# Altium PCB PCB.PcbDoc
Units mm, origin at the board's own origin, x right, y up, seen from the top; angles counter-clockwise.
Board outline 11.25 x 9.5 mm, 8 copper layers (Top Layer, Int1 (Sign), Int2 (Sign), Int3 (Sign), Int4 (Sign), Int5 (Sign), Int6 (Sign), Bottom Layer), stack 0.741 mm thick; 45 components, 24 nets, 187 pads, 97 vias.
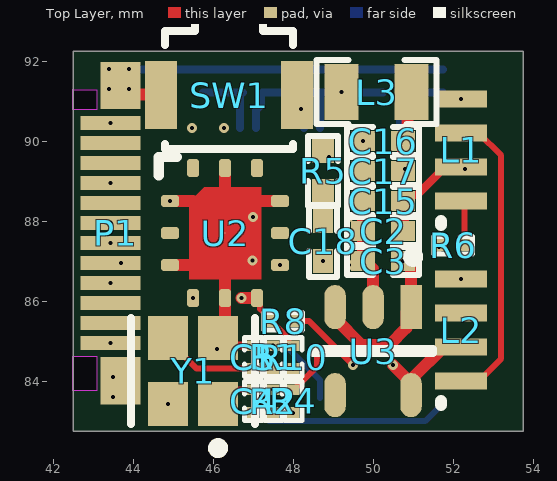
[diagram p0: Top Layer view]
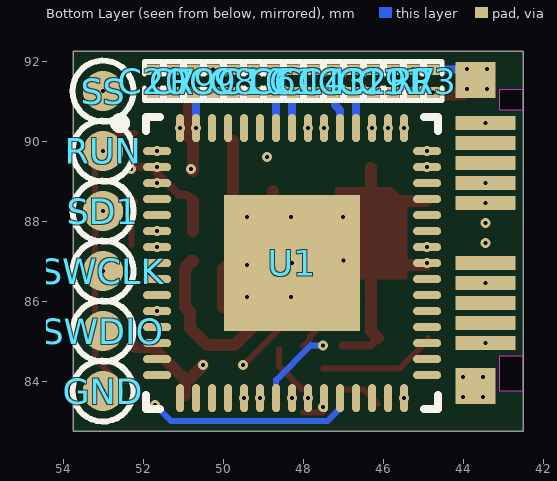
[diagram p1: Bottom Layer view, seen from below]
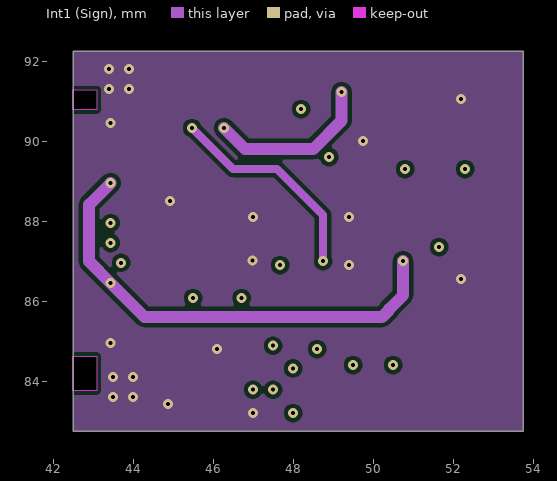
[diagram p2: Int1 (Sign)]
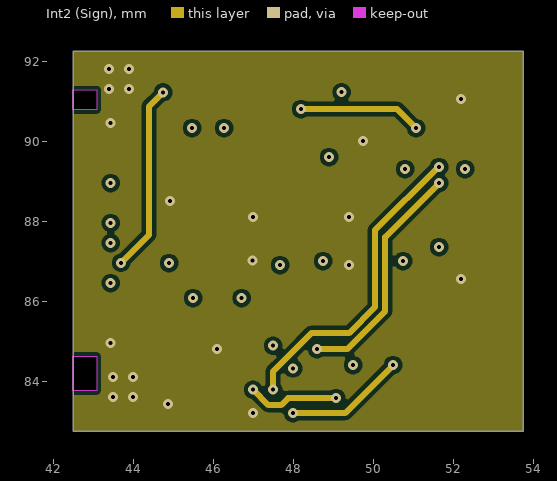
[diagram p3: Int2 (Sign)]
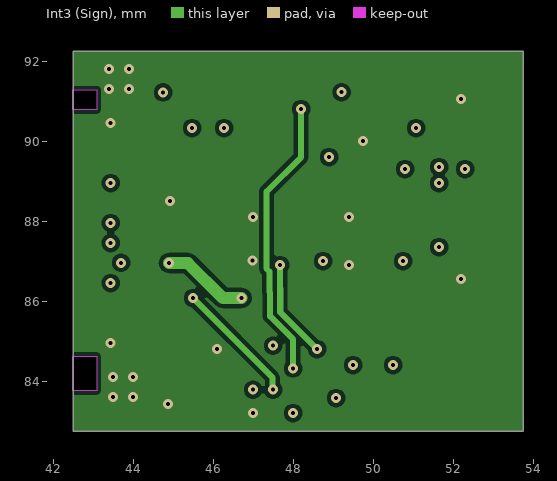
[diagram p4: Int3 (Sign)]
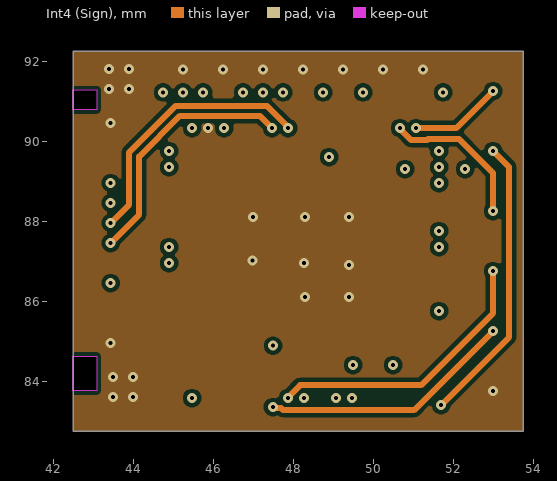
[diagram p5: Int4 (Sign)]
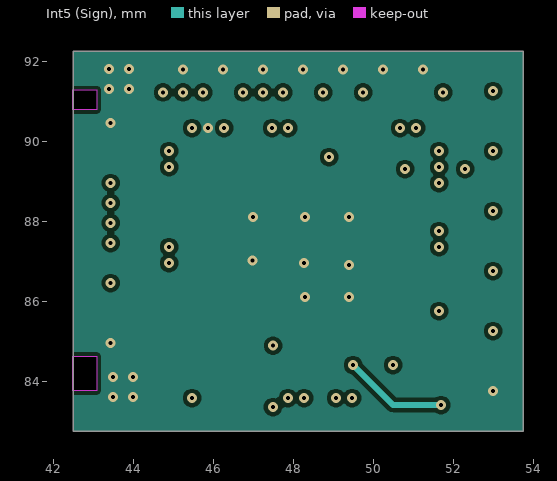
[diagram p6: Int5 (Sign)]
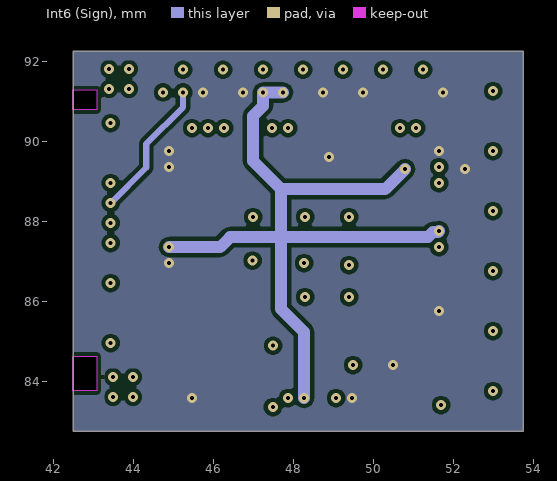
[diagram p7: Int6 (Sign)]
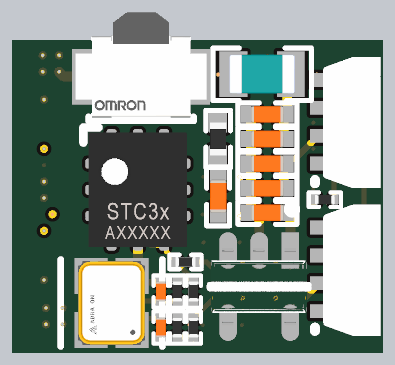
[diagram p8: 3D render of the assembled board from above, using the file's embedded part models]
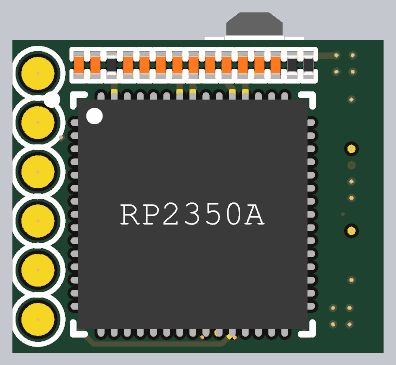
[diagram p9: 3D render of the assembled board from below, using the file's embedded part models]

## Layer stack, top to bottom
Top Solder: solder mask 0.0254, SM-001, Dk 4
Top Layer: signal copper 0.0175
Dielectric 2: prepreg 0.0584, PP-002, Dk 3.8
Int1 (Sign): signal copper 0.0175
Dielectric 3: prepreg 0.0584, PP-002, Dk 3.8
Int2 (Sign): signal copper 0.0175
Dielectric 5: prepreg 0.0584, PP-002, Dk 3.8
Int3 (Sign): signal copper 0.0175
Dielectric 6: core 0.2507, Core-027, Dk 4.5
Int4 (Sign): signal copper 0.0175
Dielectric 7: prepreg 0.0584, PP-002, Dk 3.8
Int5 (Sign): signal copper 0.0175
Dielectric 9: prepreg 0.0584, PP-002, Dk 3.8
Int6 (Sign): signal copper 0.0175
Dielectric 10: prepreg 0.0584, PP-002, Dk 3.8
Bottom Layer: signal copper 0.0175
Bottom Solder: solder mask 0.0254, SM-001, Dk 4

## Board outline
42.5,82.75 53.75,82.75 53.75,92.25 42.5,92.25

## Design rules (kind name [scope] priority, off if disabled: settings)
BoardOutlineClearance [All] p1: gap=0.005 ignorepadtopadclearanceinfootprint=FALSE
Clearance [All] p1: gap=0.1 ignorepadtopadclearanceinfootprint=TRUE
ComponentClearance [All] p1 off: gap=0.254 collisioncheckmode=3 verticalgap=0.254 showdistances=FALSE
DiffPairsRouting [InDifferentialPair('DiffPair')] p1: maxlimit=0.254 minlimit=0.089 mostfreqgap=0.2 toplayer_minwidth=0.089 toplayer_maxwidth=0.381 toplayer_prefwidth=0.15 midlayer1_minwidth=0.089 midlayer1_maxwidth=0.381 midlayer1_prefwidth=0.15 midlayer2_minwidth=0.089 midlayer2_maxwidth=0.381 midlayer2_prefwidth=0.15 midlayer3_minwidth=0.089 midlayer3_maxwidth=0.381 midlayer3_prefwidth=0.15 midlayer4_minwidth=0.089 midlayer4_maxwidth=0.381 midlayer4_prefwidth=0.15 midlayer5_minwidth=0.089 midlayer5_maxwidth=0.381 midlayer5_prefwidth=0.15 midlayer6_minwidth=0.089 midlayer6_maxwidth=0.381 midlayer6_prefwidth=0.15 bottomlayer_minwidth=0.089 bottomlayer_maxwidth=0.381 bottomlayer_prefwidth=0.15 maxuncoupledlength=12.7
HoleSize [All] p1 off: absolutevalues=TRUE maxlimit=2.54 minlimit=0.025 maxpercent=80.000 minpercent=20.000
HoleToHoleClearance [All] p1 off: gap=0.254 allowstackedmicrovias=TRUE
MatchedLengths usb [InDifferentialPair('USB')] p1: tolerance=1 checknetsindiffpair=FALSE checkdiffpairvsdiffpair=TRUE checkxsignals=TRUE checkothers=TRUE
MinimumAnnularRing [IsVia] p1: minimumring=0.076
MinimumSolderMaskSliver [All] p1 off: minsoldermaskwidth=0.254
PlaneConnect [InNet('NetC11_2')] p1: planeconnectstyle=Direct reliefexpansion=0.508 reliefentries=4 reliefconductorwidth=0.254 reliefairgap=0.254
PolygonConnect [All] p1: thpad.connectstyle=Relief thpad.reliefconductorwidth=0.254 thpad.reliefentries=4 thpad.polygonreliefangle="90 Angle" thpad.airgapwidth=0.254 smdpad.connectstyle=Relief smdpad.reliefconductorwidth=0.254 smdpad.reliefentries=4 smdpad.polygonreliefangle="90 Angle" smdpad.airgapwidth=0.254 via.connectstyle=Direct via.reliefconductorwidth=0.254 via.reliefentries=4 via.polygonreliefangle="90 Angle" via.airgapwidth=0.254
PolygonConnect 3V3MCU [InNet('NetC11_2')] p2: connectstyle=Direct reliefconductorwidth=0.254 reliefentries=4 polygonreliefangle="90 Angle" airgapwidth=0.254
PolygonConnect VBUSMCU [InNet('NetC12_2')] p3: connectstyle=Direct reliefconductorwidth=0.254 reliefentries=4 polygonreliefangle="90 Angle" airgapwidth=0.254
PolygonConnect VUSB [InNet('VUSB')] p4: connectstyle=Direct reliefconductorwidth=0 reliefentries=4 polygonreliefangle="90 Angle" airgapwidth=0
PolygonConnect viagnd [InNet('GND')] p5: thpad.connectstyle=Relief thpad.reliefconductorwidth=0.254 thpad.reliefentries=4 thpad.polygonreliefangle="90 Angle" thpad.airgapwidth=0.254 smdpad.connectstyle=Relief smdpad.reliefconductorwidth=0.254 smdpad.reliefentries=4 smdpad.polygonreliefangle="90 Angle" smdpad.airgapwidth=0.254 via.connectstyle=Direct via.reliefconductorwidth=0.254 via.reliefentries=4 via.polygonreliefangle="90 Angle" via.airgapwidth=0.254
RoutingVias [All] p1: holewidth=0.2 width=0.4 viastyle="Through Hole" minholewidth=0.1 minwidth=0.2 maxholewidth=6.3 maxwidth=1.27
SilkToSilkClearance [All] p1 off: silktosilkclearance=0.254
SilkToSolderMaskClearance [IsPad] p1 off: minsilkscreentomaskgap=0.254 clearancetoexposedcopper=TRUE
SolderMaskExpansion [All] p1: expansion=0.102 istentingtop=FALSE
SupplyNets "Schematic Supply Nets_3" [InNet('DVDD')] p1: voltage=0.000
SupplyNets "Schematic Supply Nets_2" [InNet('VBUS')] p2: voltage=0.000
SupplyNets "Schematic Supply Nets_1" [InNet('P3V3')] p3: voltage=0.000
SupplyNets "Schematic Supply Nets" [InNet('GND')] p4: voltage=0.000
Width [All] p1: maxlimit=1 minlimit=0.081 preferedwidth=0.15
22 further rules are at their usual default settings.

## Classes and differential pairs
component class U_LED: C19 C20 L1 L2 R6
component class U_RP2354A: C4 C5 C6 C7 C8 C9 C10 C11 C12 C13 C14 C15 C16 C17 C18 GND L3 R1 R2 R4 R5 R8 R9 R10 RUN SD1 SS SW1 SWCLK SWDIO U1 Y1
component class U_USBC: C2 C3 P1 R3 R7 U3
component class U_CO2Sensor: C1 U2
differential pair USB: +USB_P -USB_N

## Components (designator, comment, footprint, x,y, rotation, side; value= is the part's Value field where it differs from the comment)
C1 "100nF" C0201 48.25,91.5 r270 bottom value=100pF
C2 "1uF" C0402 50.25,87.75 r0 top value=100pF
C3 "1uF" C0402 50.25,87 r0 top value=100pF
C4 "15pF" C0201 47,83.5 r270 top value=100pF
C5 "15pF" C0201 47,84.6 r270 top value=100pF
C6 "100nF" C0201 48.75,91.5 r90 bottom value=100pF
C7 "100nF" C0201 51.25,91.5 r90 bottom value=100pF
C8 "100nF" C0201 49.75,91.5 r90 bottom value=100pF
C9 "100nF" C0201 50.25,91.5 r90 bottom value=100pF
C10 "100nF" C0201 49.25,91.5 r90 bottom value=100pF
C11 "100nF" C0201 45.75,91.5 r90 bottom value=100pF
C12 "100nF" C0201 46.75,91.5 r90 bottom value=100pF
C13 "100nF" C0201 47.25,91.5 r90 bottom value=100pF
C14 "100nF" C0201 47.75,91.5 r90 bottom value=100pF
C15 "4.7uF" C0402 50.25,88.5 r0 top value=100pF
C16 "4.7uF" C0402 50.25,90 r0 top locked value=100pF
C17 "4.7uF" C0402 50.25,89.25 r0 top value=100pF
C18 "4.7uF" C0402 48.75,87.5 r270 top value=100pF
C19 "100nF" C0201 46.25,91.5 r270 bottom value=100pF
C20 "100nF" C0201 51.75,91.5 r270 bottom value=100pF
GND "DNP" TP_SMD_1.0mm 53,83.75 r90 bottom locked
L1 "WS2812B-4020" WS2812B-4020-FOOTPRINT-1 52.2,88.5 r270 top locked
L2 "WS2812B-4020" WS2812B-4020-FOOTPRINT-1 52.2,84 r270 top locked
L3 "3.3uH" IND0805 50.088,91.223 r0 top locked value=120R/0.55A
P1 "632712000011" 632712000011 36.64,87.7 r270 top locked
R1 "1K" R0201 47.5,84.6 r270 top value=0R
R2 "4K7" R0201 47.5,83.5 r270 top value=0R
R3 "5.1K" R0201 44.75,91.5 r90 bottom value=0R
R4 "4K7" R0201 48,83.5 r270 top value=0R
R5 "33R" RES0402 48.75,89.25 r90 top locked value=0R
R6 "22R" R0201 52,87.4 r180 top value=0R
R7 "5.1K" R0201 45.25,91.5 r90 bottom value=0R
R8 "10K" R0201 47.75,85.5 r0 top value=0R
R9 "10K" R0201 50.75,91.5 r90 bottom value=0R
R10 "10K" R0201 48,84.6 r270 top value=0R
RUN "DNP" TP_SMD_1.0mm 53,89.75 r90 bottom locked
SD1 "DNP" TP_SMD_1.0mm 53,88.25 r90 bottom locked
SS "DNP" TP_SMD_1.0mm 53,91.25 r90 bottom locked
SW1 "B3U-3000PM" FP-B3U-3000PM-MFG 46.4,91.5 r0 top locked
SWCLK "DNP" TP_SMD_1.0mm 53,86.75 r90 bottom locked
SWDIO "DNP" TP_SMD_1.0mm 53,85.25 r90 bottom locked
U1 "RP2354A" RP2354A 48.275,86.95 r180 bottom locked
U2 "CO2 Sensor" STC31-C 46.3,87.7 r0 top locked
U3 "AP2112K-3.3TRG1" FP-SOT25-IPC_C 50,84.75 r270 top locked
Y1 "ABM10AIG-12.000MHZ-2Z-T" FP-ABM10AIG-MFG 45.5,84.25 r90 top locked

## Footprints (in the part's own frame and the unit in brackets; to place one, negate y for a bottom-side part, rotate by r counter-clockwise, add the part's x,y. Pads: shape width x height; smd on the part's side, far side on the other; paste and mask are expansions set on the pad)
632712000011 [mm] "USB 3.1 Type C Plug Horizontal SMT"
  rect 0.35x1.5 smd: A1(2.75,6.8) A2(2.25,6.8) A3(1.75,6.8) A4(1.25,6.8) A5(0.75,6.8) A6(0.25,6.8) A7(-0.25,6.8) A8(-0.75,6.8) A9(-1.25,6.8) A10(-1.75,6.8) A11(-2.25,6.8) A12(-2.75,6.8)
  rect 0.35x1.5 smd far side: B1(-2.75,6.8) B2(-2.25,6.8) B3(-1.75,6.8) B4(-1.25,6.8) B5(-0.75,6.8) B8(0.75,6.8) B9(1.25,6.8) B10(1.75,6.8) B11(2.25,6.8) B12(2.75,6.8)
  rect 0.9x1 smd far side: Shell(-3.825,7.05) Shell(3.825,7.05)
  rect 1.18x1 smd: Shell(-3.69,7.05) Shell(3.69,7.05)
  Keep-Out Layer board cut-out: 3.075,5.85 3.075,6.45 3.945,6.45 3.945,5.85
  Keep-Out Layer board cut-out: -3.58,5.85 -3.58,6.45 -3.08,6.45 -3.08,5.85
  body extent -5.13,-5.92 5.12,7.48, height 1.74
C0201 [mm]
  rect 0.27x0.3 smd: 1(-0.285,0) 2(0.285,0)
  silkscreen extent -0.49,-0.22 0.49,0.22, body extent -0.3,-0.15 0.3,0.15, height 0.3
C0402 [mm]
  rect 0.6x0.5 smd: 1(-0.5,0) 2(0.5,0)
  silkscreen extent -0.9,-0.35 0.9,0.35, body extent -0.51,-0.25 0.51,0.25, height 0.5
FP-ABM10AIG-MFG [mm]
  rect 1.1x1 smd paste+0 mask+0: 1(-0.825,-0.625) 2(0.825,-0.625) 3(0.825,0.625) 4(-0.825,0.625)
  silkscreen extent -2.05,-1.55 1.33,1.55, body extent -1.48,-1.22 1.48,1.22, height 0.25
FP-B3U-3000PM-MFG [mm]
  rect 0.8x1.7 smd paste+0 mask+0: 1(-1.7,-0.35) 2(1.7,-0.35)
  silkscreen extent -1.6,-1.7 1.6,1.7, body extent -2.2,-1.8 2.2,1.8, height 0.25
FP-SOT25-IPC_C [mm]
  rect 1.107x0.536 smd paste+0 mask+0: 1(-1.101,0.95)
  rrect100% 1.107x0.536 smd paste+0 mask+0: 2(-1.101,0) 3(-1.101,-0.95) 4(1.101,-0.95) 5(1.101,0.95)
  silkscreen extent -2.48,-1.5 0.05,1.5, body extent -1.75,-1.6 1.75,1.6, height 0.25
IND0805 [mm] "Inductor 0805 reflow soldering"
  rect 0.85x1.4 smd: 1(-0.875,0) 2(0.875,0)
  silkscreen extent -1.5,-0.8 1.5,0.8, body extent -1,-0.59 1,0.6, height 0.99
R0201 [mm]
  rect 0.27x0.3 smd: 1(-0.285,0) 2(0.285,0)
  silkscreen extent -0.49,-0.22 0.49,0.22, body extent -0.3,-0.15 0.3,0.15, height 0.23
RES0402 [mm]
  rect 0.6x0.55 smd: 1(-0.5,0) 2(0.5,0)
  silkscreen extent -0.87,-0.38 0.88,0.38, body extent -0.5,-0.25 0.5,0.25, height 0.3
RP2354A [mm] "QFN, 60-Leads, Body 7.00x7.00mm, Pitch 0.40mm, Thermal Pad 3.40x3.40mm, IPC High Density"
  oval 0.7x0.2 smd: 1(-3.375,2.8) 2(-3.375,2.4) 3(-3.375,2) 4(-3.375,1.6) 5(-3.375,1.2) 6(-3.375,0.8) 7(-3.375,0.4) 8(-3.375,0) 9(-3.375,-0.4) 10(-3.375,-0.8) 11(-3.375,-1.2) 12(-3.375,-1.6) 13(-3.375,-2) 14(-3.375,-2.4) 15(-3.375,-2.8) 31(3.375,-2.8) 32(3.375,-2.4) 33(3.375,-2) 34(3.375,-1.6) 35(3.375,-1.2) 36(3.375,-0.8) 37(3.375,-0.4) 38(3.375,0) 39(3.375,0.4) 40(3.375,0.8) 41(3.375,1.2) 42(3.375,1.6) 43(3.375,2) 44(3.375,2.4) 45(3.375,2.8)
  oval 0.2x0.7 smd: 16(-2.8,-3.375) 17(-2.4,-3.375) 18(-2,-3.375) 19(-1.6,-3.375) 20(-1.2,-3.375) 21(-0.8,-3.375) 22(-0.4,-3.375) 23(0,-3.375) 24(0.4,-3.375) 25(0.8,-3.375) 26(1.2,-3.375) 27(1.6,-3.375) 28(2,-3.375) 29(2.4,-3.375) 30(2.8,-3.375) 46(2.8,3.375) 47(2.4,3.375) 48(2,3.375) 49(1.6,3.375) 50(1.2,3.375) 51(0.8,3.375) 52(0.4,3.375) 53(0,3.375) 54(-0.4,3.375) 55(-0.8,3.375) 56(-1.2,3.375) 57(-1.6,3.375) 58(-2,3.375) 59(-2.4,3.375) 60(-2.8,3.375)
  rect 3.4x3.4 smd: 61(0,0)
  silkscreen extent -4.43,-3.65 3.65,3.65, body extent -3.5,-3.5 3.5,3.5, height 0.9
STC31-C [mm] "CO₂ accuracy of ±(0.2 - 2.0 vol%) @0-100 vol%"
  rrect50% 0.45x0.3 smd: 1(-1.375,0.8) 2(-1.375,0) 3(-1.375,-0.8) 7(1.375,-0.8) 8(1.375,0) 9(1.375,0.8)
  rrect50% 0.3x0.45 smd: 4(-0.8,-1.625) 5(0,-1.625) 6(0.8,-1.625) 10(0.8,1.625) 11(0,1.625) 12(-0.8,1.625)
  round 0.025 smd: 13(0,0)
  Top Layer region: -0.9,-1.15 -0.9,0.77 -0.52,1.15 0.9,1.15 0.9,-1.15
  silkscreen extent -1.66,1.44 -1.2,1.9, body extent -1.5,-1.75 1.5,1.75, height 1
TP_SMD_1.0mm [mm]
  round 1 smd paste-5: 1(0,0)
  silkscreen extent -0.76,-0.76 0.76,0.76
WS2812B-4020-FOOTPRINT-1 [mm]
  rect 0.42x1.3 smd: 1(0,0) 2(-0.85,0) 3(-1.7,0) 4(-2.55,0)
  silkscreen extent 0.5,-0.5 0.6,-0.5, body extent -3.25,-0.25 0.75,1.5, height 2

## Part data
C1 C2 C3 C4 C5 C6 C7 C8 C9 C10 C11 C12 C13 C14 C15 C16 C17 C18 C19 C20: library part CAP, "Capacitor", Published=8-Jun-2000, Publisher="Altium Limited", Revision="July-2002: Re-released for DXP Platform."
GND RUN SD1 SS SWCLK SWDIO: library part TP
L1 L2: "WS2812B based adressable led 90 deg 0402 mini", ComponentLink1Description=China, ComponentLink1URL=https://www.youtube.com/watch?v=W8x4m-qpmJ8, ComponentLink2Description=Datasheet, ComponentLink2URL=https://datasheet.lcsc.com/lcsc/2012110135_Worldsemi-WS2812B-4020_C965557.pdf, MPN=WS2812B-4020
L3: library part IND, "Inductor", Manufacturer=Murata, Manufacturer Part Number=BLM15AG121SN1D, Part Number=FB0402-120R@100M-500mA, Part number IPS=N.A., Artikkelnr Noca=33029317, ComponentLink1Description=Datasheet, ComponentLink2Description="Supplier link", Footprint Doc=0402, HelpURL=http://search.murata.co.jp/Ceramy/image/img/PDF/ENG/L0110S0100BLM15A_SN.pdf, LatestRevisionDate=2014-01-10, Note="Chip EMIFIL Inductor Type Chip Ferrite Bead", Pin Count=2, Published=2011-11-14, Publisher="Nordic Semiconductor"
P1: library part CMP-1502-03215-3, Contact Resistance=30mΩ, Current Rating=5A, Insulation Resistance=1GΩ, Max Operating Temperature=105°C, Min Operating Temperature=-25°C, Voltage Rating=20V, Connector Type=USB, Contact Material="Gold, Nickel", Height=1.9mm, Mount="Horizontal, Surface Mount", NexarPartId=68112673, Number of Contacts=22, Number of Pins=22, Orientation=Horizontal, Packaging="Tape and Reel", RoHS=Compliant, USB Standard="USB 3.1"
R1 R2 R3 R4 R5 R6 R7 R8 R9 R10: library part RES, "Resistor, Generic", Part Number=R0201-0R, Part number IPS=00000003245, Artikkelnr Noca=N.A., ComponentLink1Description=Datasheet, ComponentLink2Description="Supplier link", Footprint Doc=0201, LatestRevisionDate=2017-11-09, Note="Chip Res 5%", Pin Count=2, Published=2014-11-13, Publisher="Nordic Semiconductor"
SW1: library part CMP-08834-000057-1, "SWITCH TACTILE SPST-NO 0.05A 12V", Case/Package=SMD/SMT, Contact Resistance=100mR, Current Rating=50mA, Max Operating Temperature=70°C, Max Voltage Rating (DC)=12V, Min Operating Temperature=-25°C, Operating Force=1.59N, Package Quantity=1000, Ratings="Dust Proof", Actuator Length=0.7mm, Connector Type=SMD/SMT, Depth=3.2mm, Electrical Life=100000Cycles, Illumination Type=Non-Illuminated, Length=4mm, Max Current Rating=50mA, Mechanical Life=100000Cycles, Mount="Surface Mount", Orientation="Right Angle", Packaging="Tape and Reel", RoHS Compliant=Yes, Series=B3U, Switch Function=Off-Mom, Switch Travel=0.2mm, Termination="Gull Wing", Throw Configuration=SPST, Voltage Rating (DC)=12V, Weight=0.022g
U1: "RP2354A: 30 GPIO, 7x7 QFN60, 2MB stacked flash"
U2: library part STC31-C, "CO₂ accuracy of ±(0.2 - 2.0 vol%) @0-100 vol%"
U3: library part CMP-12756-000035-1, "IC REG LINEAR 3.3V 600MA SOT25", Case/Package=SOT-23-5, Dropout Voltage=250mV, Max Input Voltage=6V, Max Operating Temperature=85°C, Max Output Current=600mA, Min Input Voltage=2.5V, Min Operating Temperature=-40°C, Output Voltage=3.3V, Package Quantity=1, Quiescent Current=55uA, Accuracy=1.5%, Height=1.3mm, Lead Free="Lead Free", Length=3.1mm, Mount="Surface Mount", Number of Outputs=1, Number of Pins=5, Number of Regulators=1, Output Current=600mA, Output Type=Fixed, Packaging="Tape and Reel", Polarity=Positive, Width=1.7mm
Y1: library part CMP-27762-010436-1, "CRYSTAL 12.0000MHZ 10PF SMD"

## Via types
v1: diameter 0.25, hole 0.1, Int4 (Sign) to Bottom Layer, tented both sides, 42 vias
v2: diameter 0.25, hole 0.1, Top Layer to Bottom Layer, tented both sides, 25 vias
v3: diameter 0.25, hole 0.1, Top Layer to Int3 (Sign), tented both sides, 20 vias
v4: diameter 0.25, hole 0.1, Int2 (Sign) to Bottom Layer, tented both sides, 6 vias
v5: diameter 0.25, hole 0.1, Top Layer to Int3 (Sign), 2 vias
v6: diameter 0.25, hole 0.1, Top Layer to Bottom Layer, 2 vias

## Nets (pads, with @x,y where several pads share a name; then routed paths per layer and width w, separated by ;. In a path a pad name is that pad's centre, name@x,y a point inside that pad or via, vN(x,y) a via of type N, cw(c..) or ccw(c..) an arc to the next point about the centre after c; other vN are vias at no path point)
DVDD: C13.1 C14.1 C16.2 C17.2 L3.2 U1.6 U1.23 U1.39 U1.50 | length 22.5
  Top Layer w0.3: C17.2 C16.2 50.757,90 50.857,90.1 50.857,91.116 L3.2
  Int6 (Sign) w0.3: v1(44.9,87.35) 46.175,87.35 46.425,87.6 47.7,87.6 ; v1(47.75,91.215) v1(47.25,91.215) 47.25,90.883 47,90.633 47,89.5 47.7,88.8 ; v1(48.275,83.575) 48.275,85.225 47.7,85.8 47.7,87.6 ; v2(50.8,89.3) 50.3,88.8 47.7,88.8 ; v1(51.65,87.75) 51.625,87.725 51.495,87.725 51.37,87.6 47.7,87.6 ; 47.7,87.6 47.7,88.8
  Bottom Layer w0.2: U1.50 47.075,90.775 47.2,90.9 47.2,91.165 47.2,91.18 47.235,91.215 v1(47.25,91.215) v1(47.75,91.215)
GND: C1.1 C2.1 C3.1 C4.2 C5.1 C6.2 C7.2 C8.2 C9.2 C10.2 C11.2 C12.2 C13.2 C14.2 C15.1 C16.1 C17.1 C19.1 C20.1 GND.1 L1.4 L2.4 P1.A1 P1.A12 P1.B1 P1.B12 P1.Shell R3.2 R7.2 R9.2 SW1.1 U1.47 U1.61 U2.1 U2.3 U2.5 U2.9 U2.11 U2.13 U3.2 Y1.2 Y1.4 | length 23.1
  Top Layer w0.2: Y1.2 46.315,84.885 C5.1
  Top Layer w0.3: v2(43.9,91.3) 44.04,91.16 44.69,91.16 SW1.1 ; U2.3 45.5,86.9 U2.13 ; v3(44.925,88.5) 45.5,88.5 U2.13 ; Y1.2 46.3,85.25 U2.5 U2.13 ; U2.11 46.3,88.513 ; U2.9 46.312,88.5 46.3,88.513 ; v3(49.75,90) C17.1 C3.1 49.8,87 50,86.8 U3.2 ; U2.13 46.3,88.513
  Bottom Layer w0.2: v2(43.9,91.8) 43.915,91.785 v1(46.25,91.785) v1(48.25,91.785) C20.1
  other v1: 53,83.75 48.3,86.1 49.4,86.1 48.275,86.95 48.3,88.1 45.875,90.325 45.25,91.785 47.25,91.785 49.25,91.785 50.25,91.785 51.25,91.785
  other v2: 43.5,83.6 44,83.6 43.5,84.1 44,84.1 43.44,84.95 49.4,86.9 46.987,87.013 47,88.1 49.4,88.1 43.44,90.45 43.4,91.3 43.4,91.8
  other v3: 44.875,83.425 46.1,84.8 52.2,86.55 52.2,91.05
  other v5: 47,83.2
NetC4_1: C4.1 U1.21 Y1.1 | length 3.3
  Top Layer w0.152: Y1.1 46.485,83.785 v3(47,83.785)
  Int2 (Sign) w0.152: v3(47,83.785) 47.385,83.4 47.7,83.4 47.875,83.575 v4(49.075,83.575)
NetC5_2: C5.2 R1.2 Y1.3 | length 3
  Top Layer w0.152: Y1.3 44.875,85.025 45.585,84.315 C5.2 R1.2
NetC18_1: C18.1 R5.1 | length 0.8
  Top Layer w0.3: C18.1 R5.1
NetC18_2: C18.2 U1.46 | length 5.3
  Int1 (Sign) w0.2: v2(45.475,90.325) 46.5,89.3 47.6,89.3 48.75,88.15 v3(48.75,87)
NetL1_1: L1.1 R6.1 | length 1.1
  Top Layer w0.152: L1.1 52.285,88.415 R6.1
NetL1_3: L1.3 L2.1 | length 7.5
  Top Layer w0.152: L2.1 52.64,84 53.2,84.56 53.2,89.64 52.64,90.2 L1.3
NetL3_1: L3.1 U1.48 | length 4.2
  Int1 (Sign) w0.3: v2(46.275,90.325) 46.8,89.8 48.5,89.8 49.213,90.513 v3(49.213,91.223)
NetP1_A5: P1.A5 R3.1 | length 4.7
  Int2 (Sign) w0.152: v5(43.699,86.956) 44.4,87.657 44.4,90.865 v4(44.75,91.215)
NetP1_B5: P1.B5 R7.1 | length 3.5
  Int6 (Sign) w0.152: v1(43.44,88.45) 44.329,89.339 44.329,89.929 45.25,90.85 v1(45.25,91.215)
NetR1_1: R1.1 U1.22 | length 2
  Top Layer w0.152: R1.1@47.485,84.885 v2(47.5,84.885)
  Bottom Layer w0.152: v2(47.5,84.885) 47.815,84.885 48.675,84.025 U1.22
NetR2_1: R2.1 U1.2 U2.4 | length 11
  Int3 (Sign) w0.152: v3(45.5,86.075) 47.481,84.094 47.481,83.804 v3(47.5,83.785)
  Int2 (Sign) w0.152: v3(47.5,83.785) 47.5,84.241 48.459,85.2 49.4,85.2 50.048,85.848 50.048,87.774 51.624,89.35 v4(51.65,89.35)
NetR4_1: R4.1 U1.3 U2.7 | length 9.6
  Top Layer w0.152: R4.1 48.015,83.785 48.6,84.37 v3(48.6,84.8)
  Int3 (Sign) w0.152: v3(47.675,86.9) 47.675,86.318 47.679,86.315 47.679,85.721 v3(48.6,84.8)
  Int2 (Sign) w0.152: v3(48.6,84.8) 49.357,84.8 50.3,85.743 50.3,87.6 v4(51.65,88.95)
NetR6_2: R6.2 U1.7
  other v2: 51.65,87.35
NetR8_2: R8.2 RUN.1 U1.26 | length 16.9
  Top Layer w0.152: R8.2 48.4,85.5 v2(49.5,84.4)
  Int4 (Sign) w0.152: v1(51.7,83.4) 53.4,85.1 53.4,89.35 v1(53,89.75)
  Int5 (Sign) w0.152: v2(49.5,84.4) 50.5,83.4 v1(51.7,83.4)
  Bottom Layer w0.152: U1.26 47.075,83.325 47.4,83 51.3,83 v1(51.7,83.4)
NetR9_1: R9.1 SD1.1 U1.59 | length 4.7
  Int4 (Sign) w0.152: v1(50.675,90.325) 50.675,90.299 50.95,90.024 51.349,90.024 51.376,90.051 52.149,90.051 53,89.2 v1(53,88.25)
  Bottom Layer w0.2: v1(50.675,90.325) 50.675,91.14 50.7,91.165 50.7,91.18 50.735,91.215 R9.1
NetR10_2: R10.2 SS.1 SW1.2 U1.60 | length 12.5
  Int3 (Sign) w0.152: v3(48,84.315) 48,85.043 47.426,85.617 47.426,86.21 47.411,86.226 47.411,86.738 47.336,86.813 47.336,88.736 48.2,89.6 v3(48.2,90.8)
  Int4 (Sign) w0.152: v4(51.075,90.325) 52.075,90.325 v1(53,91.25)
  Int2 (Sign) w0.152: v3(48.2,90.8) 50.6,90.8 v4(51.075,90.325)
NetSWCLK_1: SWCLK.1 U1.24 | length 7.1
  Int4 (Sign) w0.152: v1(47.875,83.575) 47.875,83.601 48.174,83.9 51.2,83.9 53,85.7 v1(53,86.75)
NetSWDIO_1: SWDIO.1 U1.25 | length 6.4
  Int4 (Sign) w0.152: v1(47.496,83.35) 47.515,83.331 47.693,83.331 47.75,83.274 51.024,83.274 v1(53,85.25)
P3V3: C1.2 C2.2 C6.1 C7.1 C8.1 C9.1 C10.1 C11.1 C12.1 C15.2 C19.2 C20.2 L1.2 L2.2 R2.2 R4.2 R5.2 R8.1 R10.1 U1.1 U1.11 U1.20 U1.30 U1.38 U1.44 U1.45 U1.49 U1.53 U1.54 U2.6 U3.5 | length 18.8
  Top Layer w0.152: U2.6@47.174,86.001 47.174,85.806 47.465,85.515 R8.1 47.465,85.485 47.826,85.124 47.826,85.044 47.985,84.885 R10.1 ; R2.2 R4.2
  Top Layer w0.2: C15.2 50.9,88.65 51.097,88.65 51.65,89.203 51.65,89.24 51.76,89.35 L1.2
  Top Layer w0.3: v3(46.713,86.077) U2.6 U2.6 ; v2(50.5,84.4) 50.95,83.95 U3.5 ; C2.2 C15.2 ; U3.5@50.995,84.085 51.76,84.85 L2.2
  Int3 (Sign) w0.3: v4(44.9,86.95) 45.37,86.95 46.243,86.077 v3(46.713,86.077)
  Int2 (Sign) w0.152: v3(48,83.2) 49.3,83.2 v2(50.5,84.4)
  Bottom Layer w0.2: v1(45.75,91.215) C12.1@46.735,91.215 ; U1.49 46.675,91.155 C12.1@46.735,91.215 ; v1(46.75,91.215) C12.1@46.735,91.215 ; U1.53 48.275,91.19 C1.2 C6.1@48.735,91.215 ; U1.54 48.675,91.155 C6.1@48.735,91.215 ; C9.1 v1(48.75,91.215) C6.1@48.735,91.215 ; C7.1 v1(51.75,91.215)
  other v1: 45.475,83.575 49.475,83.575 51.65,85.75 44.9,89.35 44.9,89.75 51.65,89.75 49.75,91.215
  other v2: 52.3,89.3 48.9,89.6
USB_N: P1.A6 U1.51 | length 6.3
  Int4 (Sign) w0.152: v2(43.44,87.45) 44.152,88.162 44.152,89.611 45.171,90.629 47.171,90.629 v1(47.475,90.325)
USB_P: P1.A7 U1.52 | length 6.7
  Int4 (Sign) w0.152: v2(43.44,87.95) 43.9,88.41 43.9,89.716 45.066,90.882 47.344,90.882 47.875,90.351 v1(47.875,90.325)
VBUS: C3.2 P1.A4 P1.A9 P1.B4 P1.B9 U3.1 U3.3 | length 16.1
  Top Layer w0.3: U3.3 49.05,85.565 49.715,84.9 50.4,84.9 50.832,85.332 50.832,85.733 U3.1 50.95,86.8 50.9,86.85 50.9,86.9 50.8,87 v3(50.75,87)
  Int1 (Sign) w0.3: v3(43.44,88.95) 42.9,88.41 42.9,86.99 v3(43.44,86.45) 44.29,85.6 50.224,85.6 50.4,85.776 50.4,85.8 50.75,86.15 v3(50.75,87)
  other v6: 43.44,86.45 43.44,88.95
pads on no net: L2.3 P1.A2 P1.A3 P1.A8 P1.A10 P1.A11 P1.B2 P1.B3 P1.B8 P1.B10 P1.B11 U1.4 U1.5 U1.8 U1.9 U1.10 U1.12 U1.13 U1.14 U1.15 U1.16 U1.17 U1.18 U1.19 U1.27 U1.28 U1.29 U1.31 U1.32 U1.33 U1.34 U1.35 U1.36 U1.37 U1.40 U1.41 U1.42 U1.43 U1.55 U1.56 U1.57 U1.58 U2.2 U2.8 U2.10 U2.12 U3.4

## Polygon pours and split planes (outlines as drawn)
P3V3 on Int6 (Sign) "P3V3_L07_P000" (solid, pour order 0): 42,92.5 42.1,92.6 54.1,92.6 54.1,82.8 53.7,82.4 42,82.4
GND on Int5 (Sign) "GND_L06_P001" (solid, pour order 1): 41.999,92.497 42.099,92.597 54.099,92.597 54.099,82.797 53.699,82.397 41.999,82.397
GND on Int3 (Sign) "GND_L04_P003" (solid, pour order 3): 41.999,92.497 42.099,92.597 54.099,92.597 54.099,82.797 53.699,82.397 41.999,82.397
GND on Int1 (Sign) "GND_L02_P005" (solid, pour order 5): 41.996,92.461 42.096,92.561 54.096,92.561 54.096,82.761 53.696,82.361 41.996,82.361
GND on Int4 (Sign) "GND_L05_P002" (solid, pour order 2): 41.977,92.498 42.077,92.598 54.077,92.598 54.077,82.798 53.677,82.398 41.977,82.398
GND on Int2 (Sign) "GND_L03_P004" (solid, pour order 4): 42.002,92.461 42.102,92.561 54.102,92.561 54.102,82.761 53.702,82.361 42.002,82.361

## Other copper
Top Layer:
  region: 2257 vertices and 0 holes, not listed, extent 64.772,99.981 84.609,117.841